# EAGLE board HapticSleeveSchematic3 (EAGLE 9.6.2)
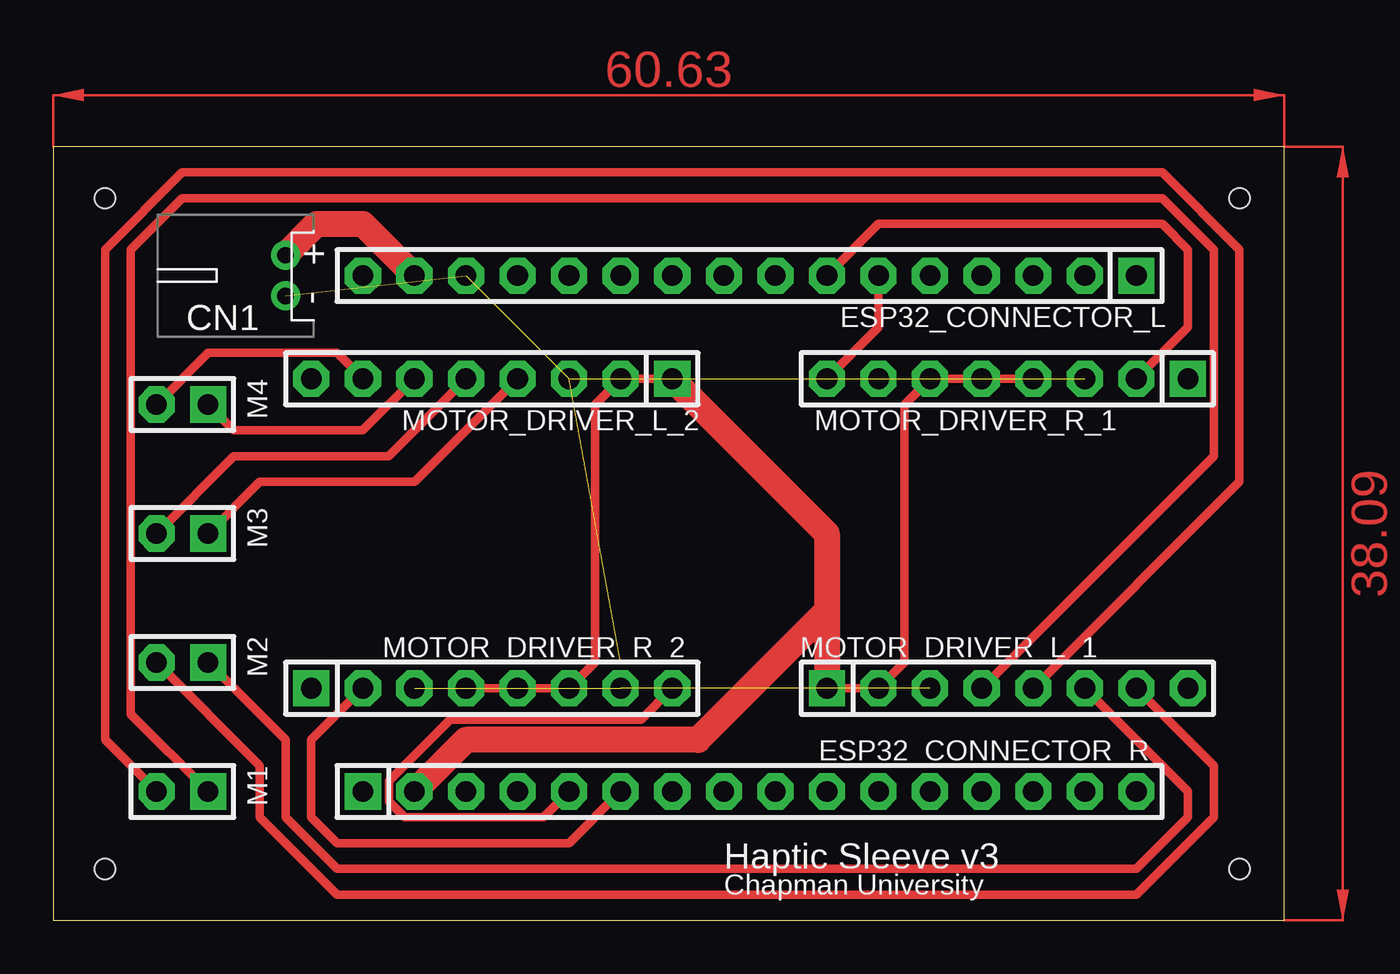
[diagram p0: board, top side]
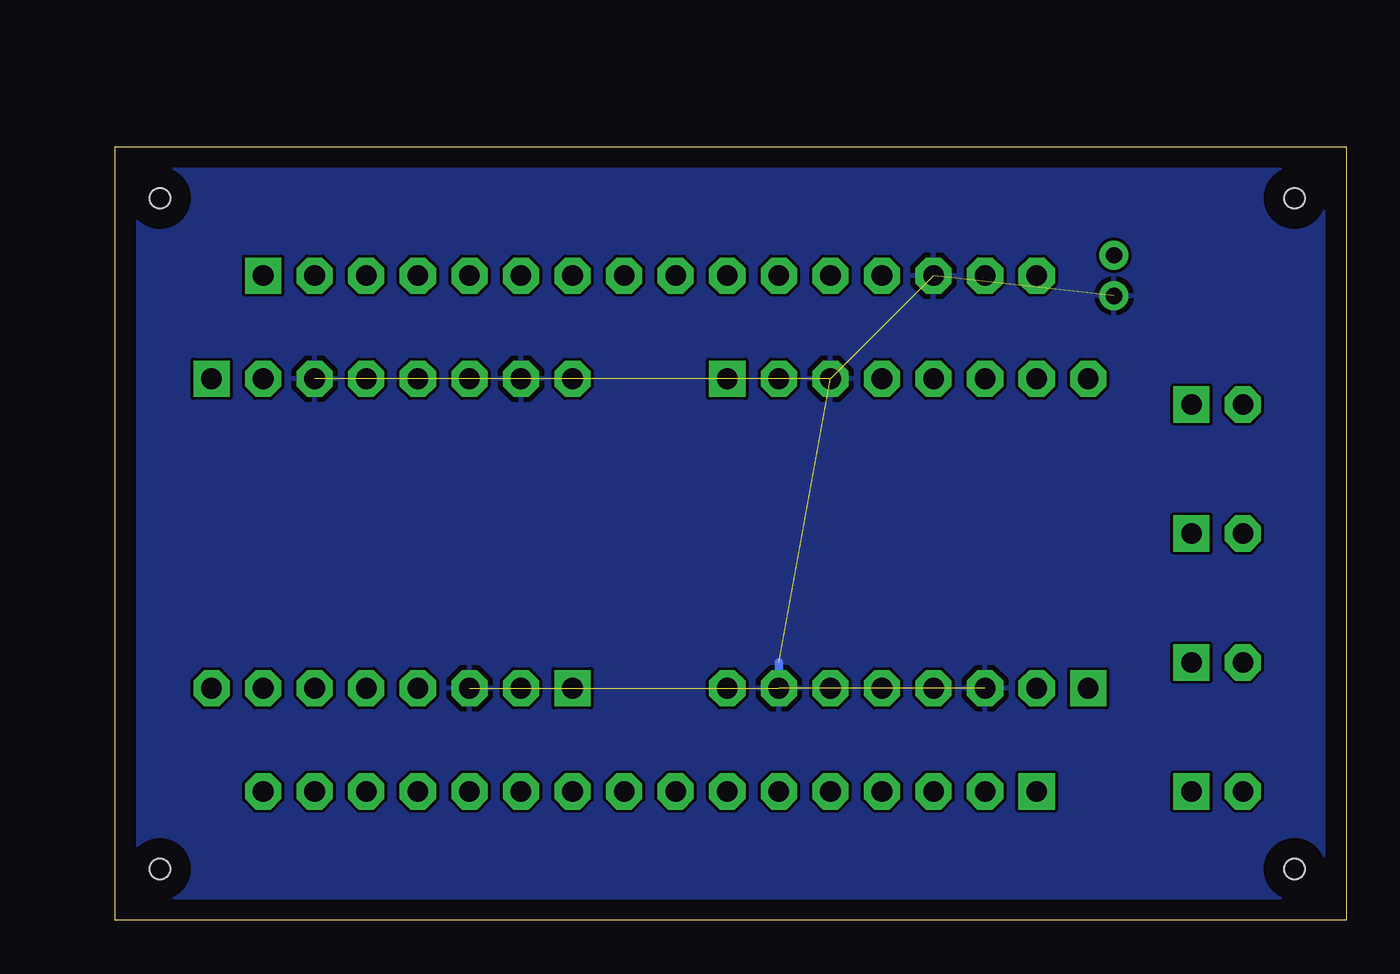
[diagram p1: board, bottom side, seen from below]

Size 60.63 x 38.09 mm. Coordinates in mm from the lower left corner, seen from the top.
Outline: 0,0 60.63,0 60.63,38.09 0,38.09 0,36.83 0,0
Copper layers (1*16): Top 0.035mm / dielectric 1.5mm / Bottom 0.035mm
Design rules "default": minimum track width 6mil, minimum drill 0.35mm, track to track 6mil, track to pad 6mil, pad to pad 6mil, via to via 6mil, smd to smd 6mil, copper to edge 40mil, drill to drill 6mil, minimum pad ring 10mil, minimum via ring 8mil, stop-mask expansion 4mil, vias tented up to drill 0mil, thermal gap 10mil
Holes 1 mm at 2.54,35.56 58.42,35.56 58.42,2.54 2.54,2.54

## Footprints (pad centres in the part's own frame; a part is rotated, then mirrored left to right if it is on the bottom)
JST-PH-2-THM-RA = drill 0.8 pad 1.422: 1 1,0; 2 -1,0
SIP-100-16-40 = drill 1.016 pad 1.778 square: 1 -19.05,0 | drill 1.016 pad 1.778 octagon: 2 -16.51,0; 3 -13.97,0; 4 -11.43,0; 5 -8.89,0; 6 -6.35,0; 7 -3.81,0; 8 -1.27,0; 9 1.27,0; 10 3.81,0; 11 6.35,0; 12 8.89,0; 13 11.43,0; 14 13.97,0; 15 16.51,0; 16 19.05,0
SIP-100-02-40 = drill 1.016 pad 1.778 square: 1 -1.27,0 | drill 1.016 pad 1.778 octagon: 2 1.27,0
SIP-100-08-40 = drill 1.016 pad 1.778 square: 1 -8.89,0 | drill 1.016 pad 1.778 octagon: 2 -6.35,0; 3 -3.81,0; 4 -1.27,0; 5 1.27,0; 6 3.81,0; 7 6.35,0; 8 8.89,0

## Placement (x,y rotation side)
CN1  [JST-PH-2-THM-RA]  11.43,31.75 90 top
ESP32_CONNECTOR_L  F-1X16-SIP-100-40  [SIP-100-16-40]  34.29,31.75 180 top
ESP32_CONNECTOR_R  F-1X16-SIP-100-40  [SIP-100-16-40]  34.29,6.35 0 top
M1  F-1X02-SIP-100-40  [SIP-100-02-40]  6.35,6.35 180 top
M2  F-1X02-SIP-100-40  [SIP-100-02-40]  6.35,12.7 180 top
M3  F-1X02-SIP-100-40  [SIP-100-02-40]  6.35,19.05 180 top
M4  F-1X02-SIP-100-40  [SIP-100-02-40]  6.35,25.4 180 top
MOTOR_DRIVER_L_1  F-1X08-SIP-100-40  [SIP-100-08-40]  46.99,11.43 0 top
MOTOR_DRIVER_L_2  F-1X08-SIP-100-40  [SIP-100-08-40]  21.59,26.67 180 top
MOTOR_DRIVER_R_1  F-1X08-SIP-100-40  [SIP-100-08-40]  46.99,26.67 180 top
MOTOR_DRIVER_R_2  F-1X08-SIP-100-40  [SIP-100-08-40]  21.59,11.43 0 top

## Library data of the parts
CN1 = adafruit
ESP32_CONNECTOR_L ESP32_CONNECTOR_R M1-M4 MOTOR_DRIVER_L_1 MOTOR_DRIVER_L_2 MOTOR_DRIVER_R_1 MOTOR_DRIVER_R_2 = con-headers-jp-1

## Nets
3V3: ESP32_CONNECTOR_R.2 MOTOR_DRIVER_L_1.1 MOTOR_DRIVER_L_1.2 MOTOR_DRIVER_L_2.1 MOTOR_DRIVER_L_2.2 MOTOR_DRIVER_R_1.4 MOTOR_DRIVER_R_1.5 MOTOR_DRIVER_R_1.6 MOTOR_DRIVER_R_2.4 MOTOR_DRIVER_R_2.5 MOTOR_DRIVER_R_2.6
GND: CN1.2 ESP32_CONNECTOR_L.14 MOTOR_DRIVER_L_1.3 MOTOR_DRIVER_L_2.3 MOTOR_DRIVER_R_1.3 MOTOR_DRIVER_R_1.7 MOTOR_DRIVER_R_2.3 MOTOR_DRIVER_R_2.7
M1+: M1.1 MOTOR_DRIVER_L_1.4
M1-: M1.2 MOTOR_DRIVER_L_1.5
M2+: M2.1 MOTOR_DRIVER_L_1.6
M2-: M2.2 MOTOR_DRIVER_L_1.7
M3+: M3.1 MOTOR_DRIVER_L_2.4
M3-: M3.2 MOTOR_DRIVER_L_2.5
M4+: M4.1 MOTOR_DRIVER_L_2.6
M4-: M4.2 MOTOR_DRIVER_L_2.7
MOTOR1: ESP32_CONNECTOR_L.6 MOTOR_DRIVER_R_1.8
MOTOR2: ESP32_CONNECTOR_L.7 MOTOR_DRIVER_R_1.2
MOTOR3: ESP32_CONNECTOR_R.5 MOTOR_DRIVER_R_2.8
MOTOR4: ESP32_CONNECTOR_R.6 MOTOR_DRIVER_R_2.2
VCC: CN1.1 ESP32_CONNECTOR_L.15

## Tracks (layer width: path | path; a pad name or v marks a point on that pad's centre or on a via)
3V3
  Top 0.406: MOTOR_DRIVER_R_1.4 MOTOR_DRIVER_R_1.5 MOTOR_DRIVER_R_1.6 41.91,25.4 41.91,12.7 MOTOR_DRIVER_L_1.2 MOTOR_DRIVER_L_1.1 | MOTOR_DRIVER_L_2.1 MOTOR_DRIVER_L_2.2 26.67,25.4 26.67,12.7 MOTOR_DRIVER_R_2.6 MOTOR_DRIVER_R_2.5 MOTOR_DRIVER_R_2.4
  Top 1.27: MOTOR_DRIVER_L_2.1 38.1,19.05 38.1,15.24 | 38.1,15.24 MOTOR_DRIVER_L_1.1 | 38.1,15.24 31.75,8.89 20.32,8.89 ESP32_CONNECTOR_R.2
GND  (7 unrouted)
  Bottom 0.406: MOTOR_DRIVER_R_2.7 27.94,12.7
  pour Bottom: 0,35.56 2.54,38.1 58.42,38.1 60.96,35.56 60.96,2.54 58.42,0 2.54,0 0,2.54
M1+
  Top 0.406: 7.79,6.35 M1.1 3.81,10.16 3.81,33.02 6.35,35.56 54.61,35.56 57.15,33.02 57.15,22.86 MOTOR_DRIVER_L_1.4
M1-
  Top 0.406: 5.34,6.35 M1.2 2.54,8.89 2.54,33.02 6.35,36.83 54.61,36.83 58.42,33.02 58.42,21.59 MOTOR_DRIVER_L_1.5
M2+
  Top 0.406: M2.1 11.43,8.89 11.43,5.08 13.97,2.54 53.34,2.54 55.88,5.08 55.88,6.35 MOTOR_DRIVER_L_1.6
M2-
  Top 0.406: M2.2 10.16,7.62 10.16,5.08 13.97,1.27 53.34,1.27 57.15,5.08 57.15,7.62 MOTOR_DRIVER_L_1.7
M3+
  Top 0.406: M3.1 10.16,21.59 17.78,21.59 MOTOR_DRIVER_L_2.4
M3-
  Top 0.406: M3.2 8.89,22.86 16.51,22.86 MOTOR_DRIVER_L_2.5
M4+
  Top 0.406: M4.1 8.89,24.13 15.24,24.13 MOTOR_DRIVER_L_2.6
M4-
  Top 0.406: M4.2 7.62,27.94 13.97,27.94 MOTOR_DRIVER_L_2.7
MOTOR1
  Top 0.406: ESP32_CONNECTOR_L.6 40.64,29.21 MOTOR_DRIVER_R_1.8
MOTOR2
  Top 0.406: ESP32_CONNECTOR_L.7 40.64,34.29 54.61,34.29 55.88,33.02 55.88,29.21 MOTOR_DRIVER_R_1.2
MOTOR3
  Top 0.406: MOTOR_DRIVER_R_2.8 28.93,9.88 19.55,9.88 16.54,6.87 16.54,5.83 17.29,5.08 24.13,5.08 ESP32_CONNECTOR_R.5
MOTOR4
  Top 0.406: MOTOR_DRIVER_R_2.2 12.7,8.89 12.7,5.08 13.97,3.81 25.4,3.81 ESP32_CONNECTOR_R.6
VCC
  Top 1.27: CN1.1 12.97,34.29 15.24,34.29 ESP32_CONNECTOR_L.15
(copper drawn outside any net)
  shapes: Top area x4

## Text on the board
tPlace: Haptic Sleeve v3 | Chapman University